# Altium PCB BME462.PcbDoc
Units mil, origin at the board's own origin, x right, y up, seen from the top; angles counter-clockwise.
Board outline 4508 x 3432 mil, 2 copper layers (Top Layer, Bottom Layer); 35 components, 35 nets, 168 pads, 0 vias.
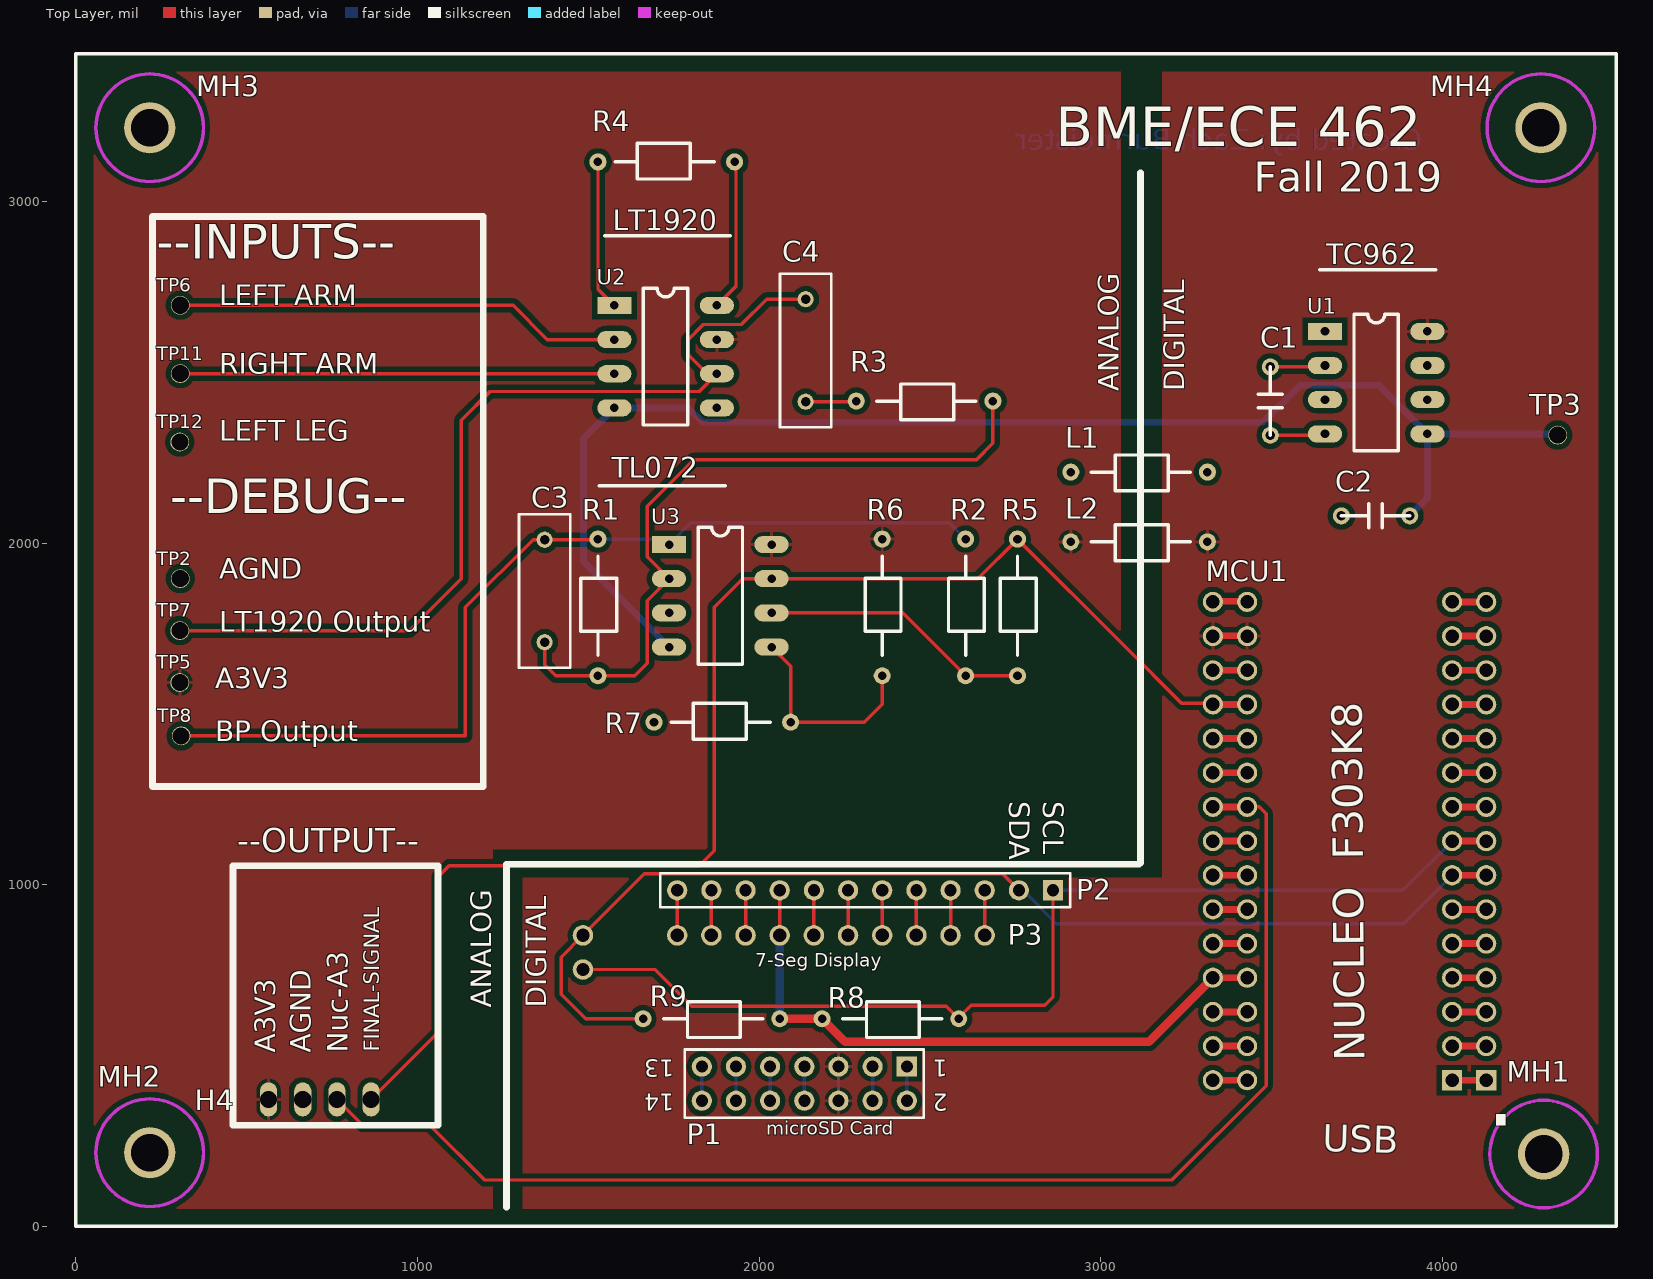
[diagram p0: Top Layer view]
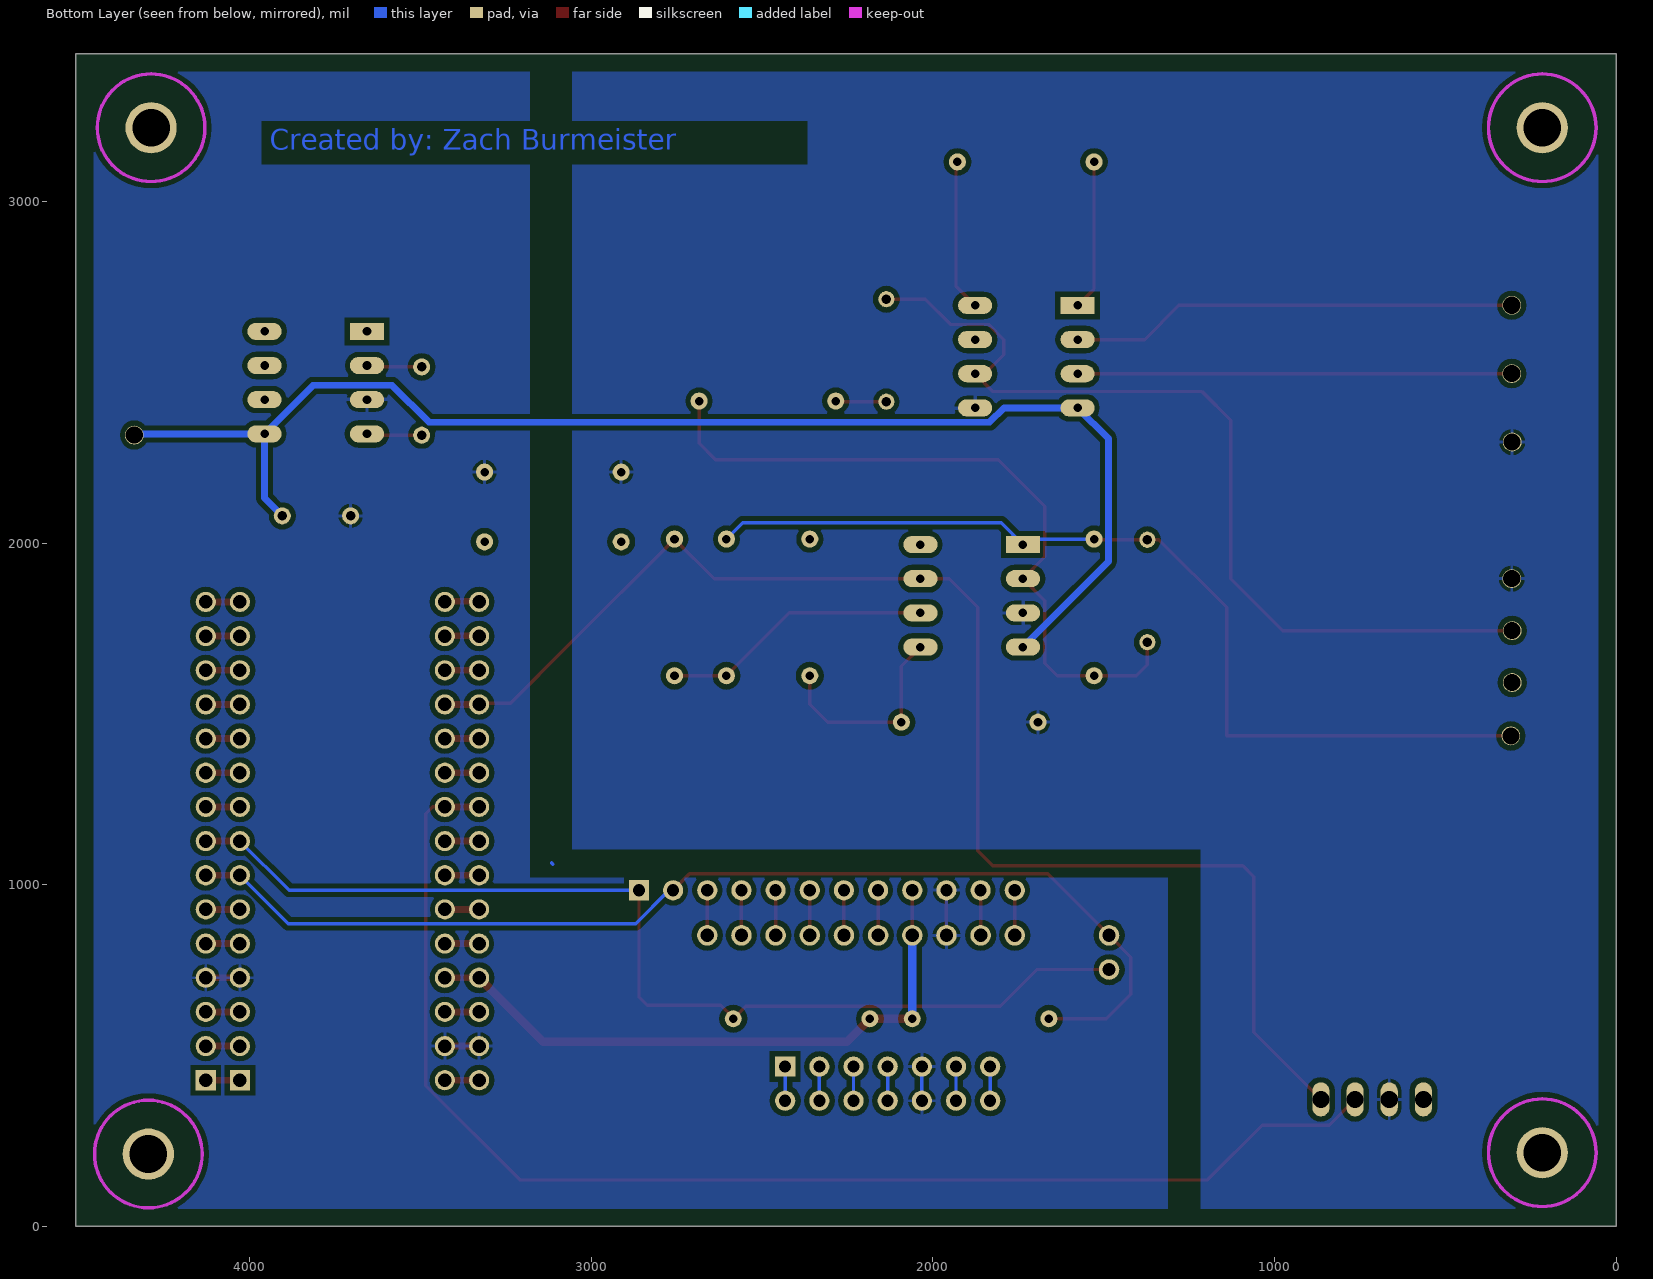
[diagram p1: Bottom Layer view, seen from below]

## Layer stack, top to bottom
Top Solder: solder mask 0.4, Solder Resist, Dk 3.5
Top Layer: signal copper 1.4
Dielectric1: dielectric 12.6, FR-4, Dk 4.8
Bottom Layer: signal copper 1.4
Bottom Solder: solder mask 0.4, Solder Resist, Dk 3.5

## Board outline
0,3432 4508,3432 4508,0 0,0

## Design rules (kind name [scope] priority, off if disabled: settings)
Clearance Polygon_Clearance [All vs InPolygon] p1: gap=15 ignorepadtopadclearanceinfootprint=FALSE except(0: Arc-Hole Track-Hole SMDPad-Hole THPad-Hole Via-Hole Fill-Hole Poly-Hole Region-Hole Text-Hole)
Clearance [All] p2: gap=7 ignorepadtopadclearanceinfootprint=FALSE except(0: Arc-Hole Track-Hole SMDPad-Hole THPad-Hole Via-Hole Fill-Hole Poly-Hole Region-Hole Text-Hole)
ComponentClearance [InComponent('U3')] p1: gap=0 collisioncheckmode=3 verticalgap=10 showdistances=FALSE
Height [All] p1: minheight=0 maxheight=866.14 prefheight=500
HoleSize [All] p1: absolutevalues=TRUE maxlimit=250 minlimit=1.18 maxpercent=80.000 minpercent=20.000
MinimumSolderMaskSliver [All] p1: minsoldermaskwidth=2
PolygonConnect [All vs IsVia] p1: connectstyle=Direct reliefconductorwidth=10 reliefentries=4 polygonreliefangle="90 Angle" airgapwidth=10
PolygonConnect PolygonConnect_1 [All] p2: connectstyle=Relief reliefconductorwidth=10 reliefentries=4 polygonreliefangle="90 Angle" airgapwidth=10
RoutingVias [All] p1: holewidth=28 width=50 viastyle="Through Hole" minholewidth=15 minwidth=25 maxholewidth=28 maxwidth=50
SilkToSolderMaskClearance [IsPad] p1: minsilkscreentomaskgap=8 clearancetoexposedcopper=TRUE
SolderMaskExpansion [All] p1: expansion=2
Width "Schematic Width Constraint" [InNet('Neg_3V3')] p1: maxlimit=20 minlimit=20 preferedwidth=20 minimp=50.000000 maximp=50.000000 favimp=50.000000
Width [All] p2: maxlimit=472.44 minlimit=3.94 preferedwidth=10 minimp=50.000000 maximp=50.000000 favimp=50.000000
25 further rules are at their usual default settings.

## Classes and differential pairs
component class "03 Peripherals": MH1 MH2 MH3 MH4 P1 P2 P3 R8 R9
component class "02 ECG Amplifier": C1 C2 C3 C4 H4 L1 L2 MCU1 R1 R2 R3 R4 R5 R6 R7 TP2 TP3 TP5 TP6 TP7 TP8 TP11 TP12 U1 U2 U3 U?

## Components (designator, comment, footprint, x,y, rotation, side; value= is the part's Value field where it differs from the comment)
C1 "Cap-10u" Capacitor 3496,2316 r90 top
C2 "Cap-10u" Capacitor 3704,2080 r0 top
C3 "Cap" RAD-0.3 1372,1860 r90 top value=100pF
C4 "Cap" RAD-0.3 2136,2564 r270 top
H4 "Header4x1" "4 pin header" 564,372 r90 top
L1 "FerriteBead" RESISTOR 2912,2208 r0 top
L2 "FerriteBead" RESISTOR 2912,2004 r0 top
MCU1 "Nucleo F303K8_FINISHED" "Nucleo F303K8" 3728,1128 r180 top
MH1 "Mounting Hole" "Mounting Hole" 4296,212 r0 top
MH2 "Mounting Hole" "Mounting Hole" 216,216 r0 top
MH3 "Mounting Hole" "Mounting Hole" 216,3216 r0 top
MH4 "Mounting Hole" "Mounting Hole" 4288,3216 r0 top
P1 "Header 7X2" HDR2X7 2432,468 r180 top
P2 "Proto Header" HDR1X12 2860,984 r180 top
P3 "7Segment" 7SegmentDisplay 1403,904 r270 top
R1 "Res-3M" RESISTOR 1528,1612 r90 top
R2 "20k" RESISTOR 2604,1612 r90 top
R3 "15k" RESISTOR 2284,2416 r0 top
R4 "Res-10k" RESISTOR 1928,3116 r180 top
R5 "Res-10k" RESISTOR 2756,1612 r90 top
R6 "20k" RESISTOR 2360,1612 r90 top
R7 "Res-10k" RESISTOR 2092,1476 r180 top
R8 "Res-2.21k" RESISTOR 2184,608 r0 top
R9 "Res-2.21k" RESISTOR 1660,608 r0 top
TP2 "TestPoint" TestPoint 304,1896 r90 top
TP3 "TestPoint" TestPoint 4336,2316 r90 top
TP5 "TestPoint" TestPoint 302.74,1591.69 r90 top
TP6 "TestPoint" TestPoint 304,2696 r90 top value="Left Arm"
TP7 "TestPoint" TestPoint 302.74,1743.69 r90 top
TP8 "TestPoint" TestPoint 306.74,1435.69 r90 top
TP11 "TestPoint" TestPoint 304,2496 r90 top value="Right Arm"
TP12 "TestPoint" TestPoint 302.74,2295.69 r90 top value="Right Leg"
U1 "TC962" DIP8 3656,2620 r0 top
U2 "LT1920" DIP8 1576,2696 r0 top
U3 "TL072" DIP8 1736,1996 r0 top

## Footprints (in the part's own frame and the unit in brackets; to place one, negate y for a bottom-side part, rotate by r counter-clockwise, add the part's x,y. Pads: shape width x height; smd on the part's side, far side on the other; paste and mask are expansions set on the pad)
"4 pin header" [mil]
  oval 100x50 hole 50: 1(0,0) 2(0,-100) 3(0,-200) 4(0,-300)
7SegmentDisplay [mil]
  round 60 hole 39: 0(52,357) 1(52,457) 2(52,557) 3(52,657) 4(52,757) 5(52,857) 6(52,957) 7(52,1057) 8(52,1157) 9(52,1257) 10(152,81) 11(52,81)
Capacitor [mil] "200 mil"
  round 50 hole 28: 1(0,0) 2(200,0)
  silkscreen extent 0,-35 200,35
DIP8 [mil]
  rect 100x50 hole 25: 1(0,0)
  oval 100x50 hole 25: 2(0,-100) 3(0,-200) 4(0,-300) 5(300,-300) 6(300,-200) 7(300,-100) 8(300,0)
  silkscreen extent 85,-350 215,50
HDR1X12 [mm] "Connector; Header; 12 Position"
  rect 1.5x1.5 hole 0.9: 1(0,0)
  round 1.5 hole 0.9: 2(2.54,0) 3(5.08,0) 4(7.62,0) 5(10.16,0) 6(12.7,0) 7(15.24,0) 8(17.78,0) 9(20.32,0) 10(22.86,0) 11(25.4,0) 12(27.94,0)
  silkscreen extent -1.27,-1.27 29.21,1.27
HDR2X7 [mm] "Connector; Header; 7x2 Position"
  rect 1.5x1.5 hole 0.9: 1(0,0)
  round 1.5 hole 0.9: 2(0,2.54) 3(2.54,0) 4(2.54,2.54) 5(5.08,0) 6(5.08,2.54) 7(7.62,0) 8(7.62,2.54) 9(10.16,0) 10(10.16,2.54) 11(12.7,0) 12(12.7,2.54) 13(15.24,0) 14(15.24,2.54)
  silkscreen extent -1.27,-1.27 16.51,3.81
"Mounting Hole" [mil]
  round 150 hole 110: 1(0,0)
  Keep-Out Layer circle w10: c0,0 r157.48
"Nucleo F303K8" [mm] "Nucleo Header"
  rect 1.5x1.5 hole 1: 1(-10.16,17.78) 1(-7.62,17.78)
  round 1.5 hole 1: 2(-10.16,15.24) 2(-7.62,15.24) 3(-10.16,12.7) 3(-7.62,12.7) 4(-10.16,10.16) 4(-7.62,10.16) 5(-10.16,7.62) 5(-7.62,7.62) 6(-10.16,5.08) 6(-7.62,5.08) 7(-10.16,2.54) 7(-7.62,2.54) 8(-10.16,0) 8(-7.62,0) 9(-10.16,-2.54) 9(-7.62,-2.54) 10(-10.16,-5.08) 10(-7.62,-5.08) 11(-10.16,-7.62) 11(-7.62,-7.62) 12(-10.16,-10.16) 12(-7.62,-10.16) 13(-10.16,-12.7) 13(-7.62,-12.7) 14(-10.16,-15.24) 14(-7.62,-15.24) 15(-10.16,-17.78) 15(-7.62,-17.78) 16(7.62,-17.78) 16(10.16,-17.78) 17(7.62,-15.24) 17(10.16,-15.24) 18(7.62,-12.7) 18(10.16,-12.7) 19(7.62,-10.16) 19(10.16,-10.16) 20(7.62,-7.62) 20(10.16,-7.62) 21(7.62,-5.08) 21(10.16,-5.08) 22(7.62,-2.54) 22(10.16,-2.54) 23(7.62,0) 23(10.16,0) 24(7.62,2.54) 24(10.16,2.54) 25(7.62,5.08) 25(10.16,5.08) 26(7.62,7.62) 26(10.16,7.62) 27(7.62,10.16) 27(10.16,10.16) 28(7.62,12.7) 28(10.16,12.7) 29(7.62,15.24) 29(10.16,15.24) 30(7.62,17.78) 30(10.16,17.78)
  Top Layer lines w0.508: 10.262,-17.831 7.722,-17.831 ; 10.16,17.78 7.62,17.78 ; 10.16,15.24 7.62,15.24 ; 10.16,12.7 7.62,12.7 ; 10.16,10.16 7.62,10.16 ; 10.16,7.62 7.62,7.62 ; 10.16,5.08 7.62,5.08 ; 10.16,2.54 7.62,2.54 ; 10.16,0 7.62,0 ; 10.16,-2.54 7.62,-2.54 ; 10.16,-5.08 7.62,-5.08 ; 10.16,-7.62 7.62,-7.62 ; 10.16,-10.16 7.62,-10.16 ; 10.16,-12.7 7.62,-12.7 ; 9.982,-15.265 7.442,-15.265 ; -7.62,17.78 -10.16,17.78 ; -7.62,15.24 -10.16,15.24 ; -7.62,12.7 -10.16,12.7 ; -7.62,10.16 -10.16,10.16 ; -7.62,7.62 -10.16,7.62 ; -7.62,5.08 -10.16,5.08 ; -7.62,2.54 -10.16,2.54 ; -7.62,0 -10.16,0 ; -7.62,-2.54 -10.16,-2.54 ; -7.62,-5.08 -10.16,-5.08 ; -7.62,-7.62 -10.16,-7.62 ; -7.62,-10.16 -10.16,-10.16 ; -7.62,-12.7 -10.16,-12.7 ; -7.62,-15.24 -10.16,-15.24 ; -7.62,-17.78 -10.16,-17.78
RAD-0.3 [mm] "Radial Cap, Thru-Hole; 2 Leads; 0.3 in Pin Spacing"
  round 1.2 hole 0.7: 1(-3.81,0) 2(3.81,0)
  silkscreen extent -5.71,-1.91 5.71,1.91
RESISTOR [mil]
  round 50 hole 25: 1(0,0) 2(400,0)
  silkscreen extent 60,-55 350,50
TestPoint [mil]
  round 55 hole 50 mask+3: 1(0.31,-1.26)

## Part data
C1 C2: Capacitance=10µF, Manufacturer="TDK Corporation", Manufacturer Part Number=FK26X7R1C106K, Operating Temperature="-55°C ~ 125°C", Package / Case=Radial, Ratings=-, Supplier Part Number 1=445-8549-ND, Temperature Coefficient=X7R, Tolerance=±10%, Voltage - Rated=16V, Applications="General Purpose", Category=Capacitors, ComponentLink1Description=https://product.tdk.com/info/en/documents/catalog/leadmlcc_conventional_fk_en.pdf, ComponentLink1URL=https://product.tdk.com/info/en/documents/catalog/leadmlcc_conventional_fk_en.pdf, Features=-, Height - Seated (Max)="0.236\" (6.00mm)", Lead Spacing="0.197\" (5.00mm)", Lead Style="Formed Leads - Kinked", Mounting Type="Through Hole", Packaging=Bulk, Pricing 1="1=0.45, 10=0.319, 100=0.2101, 250=0.17896, 500=0.1556, 1000=0.13226, 5000=0.1167, 10000=0.10892, 25000=0.10503 (USD)", RoHS="RoHS Compliant", Size / Dimension="0.217\" L x 0.138\" W (5.50mm x 3.50mm)", Stock 1=7933, Supplier 1=Digi-Key, Thickness (Max)=-
C3 C4: "Capacitor", LatestRevisionDate=17-Jul-2002, LatestRevisionNote="Re-released for DXP Platform.", PackageDescription="Radial Cap, Thru-Hole; 2 Leads; 0.3 in Pin Spacing", PackageReference=RAD-0.3, Published=8-Jun-2000, Publisher="Altium Limited"
  C4: =22µF
L1 L2: Current Rating (Max)=5A, DC Resistance (DCR) (Max)="10 mOhm", Impedance @ Frequency="75 Ohm @ 100MHz", Manufacturer="Laird-Signal Integrity Products", Manufacturer Part Number=28L0138-10R-10, Operating Temperature=-, Package / Case=Axial, Supplier Part Number 1=240-2438-1-ND, Category=Filters, ComponentLink1Description=http://media.digikey.com/pdf/Data%20Sheets/Laird%20Technologies/28L0138-10R-10_Dwg.pdf, ComponentLink1URL=http://media.digikey.com/pdf/Data%20Sheets/Laird%20Technologies/28L0138-10R-10_Dwg.pdf, Filter Type=-, Height (Max)=-, Mounting Type="Through Hole", Number of Lines=1, Packaging="Cut Tape (CT)", Part Status=Active, Pricing 1="1=0.1, 10=0.076, 25=0.0684, 50=0.05, 100=0.0433, 250=0.03416, 500=0.02884, 1000=0.02429 (USD)", Ratings=-, RoHS="RoHS Compliant", Size / Dimension="0.138\" Dia x 0.175\" L (3.51mm x 4.45mm)", Stock 1=25546, Supplier 1=Digi-Key
MCU1: "Nucleo F303K8", Current Rating=3A, Insulation Color=Black, Manufacturer="Sullins Connector Solutions", Manufacturer Part Number=PPTC151LFBN-RC, Material Flammability Rating="UL94 V-0", Operating Temperature="-40°C ~ 105°C", Supplier Part Number 1=S7013-ND, Voltage Rating=250V, Applications=-, Category="Connectors, Interconnects", ComponentLink1Description=http://www.sullinscorp.com/drawings/78_P(N)PxCxxxLFBN-RC,_10492-H.pdf, ComponentLink1URL=http://www.sullinscorp.com/drawings/78_P(N)PxCxxxLFBN-RC,_10492-H.pdf, Connector Type=Header, Contact Finish - Mating=Tin, Contact Finish - Post=Tin, Contact Finish Thickness - Mating=-, Contact Finish Thickness - Post=-, Contact Length - Post="0.126\" (3.20mm)", Contact Material="Phosphor Bronze", Contact Shape=Square, Contact Type="Female Socket", Fastening Type=Push-Pull, Features=-, Ingress Protection=-, Insulation Height="0.335\" (8.51mm)", Insulation Material=Polyester, Mated Stacking Heights=-, Mounting Type="Through Hole", Number of Positions=15, Number of Positions Loaded=All, Number of Rows=1, Packaging=Bulk, Part Status=Active, Pitch - Mating="0.100\" (2.54mm)", Pricing 1="1=1.22, 10=1.013, 25=0.9376, 50=0.8438, 100=0.75, 250=0.65624, 500=0.6, 1000=0.54375, 2500=0.4875 (USD)", RoHS="RoHS Compliant", Row Spacing - Mating=-, Stock 1=2938, Style="Board to Board", Supplier 1=Digi-Key, Termination=Solder
P1: "Header, 7-Pin, Dual row", LatestRevisionDate=17-Jul-2002, LatestRevisionNote="Re-released for DXP Platform.", Publisher="Altium Limited"
P2: library part "Header 12", "Header, 12-Pin", LatestRevisionDate=17-Jul-2002, LatestRevisionNote="Re-released for DXP Platform.", Publisher="Altium Limited"
R1: Manufacturer="Stackpole Electronics Inc.", Manufacturer Part Number=CF14JT30K0, Operating Temperature="-55°C ~ 155°C", Package / Case=Axial, Power (Watts)="0.25W, 1/4W", Resistance (Ohms)=3Meg, Temperature Coefficient="0/ -500ppm/°C", Tolerance=±5%, Category=Resistors, ComponentLink1Description=https://www.seielect.com/Catalog/SEI-CF_CFM.pdf, ComponentLink1URL=https://www.seielect.com/Catalog/SEI-CF_CFM.pdf, Composition="Carbon Film", Failure Rate=-, Features="Flame Retardant Coating, Safety", Height - Seated (Max)=-, Packaging="Cut Tape (CT)", Part Status=Active, RoHS="RoHS Compliant", Size / Dimension="0.091\" Dia x 0.236\" L (2.30mm x 6.00mm)", Supplier 1=Arrow, Supplier Device Package=Axial
R2 R6: library part Res-20k, Supplier 1=Arrow
R3: library part Res-15k, Supplier 1=Arrow
R4 R5 R7: Manufacturer="Stackpole Electronics Inc.", Manufacturer Part Number=CF14JT10K0, Operating Temperature="-55°C ~ 155°C", Package / Case=Axial, Power (Watts)="0.25W, 1/4W", Resistance (Ohms)=10k, Supplier Part Number 1=CF14JT10K0CT-ND, Temperature Coefficient="0/ -500ppm/°C", Tolerance=±5%, Category=Resistors, ComponentLink1Description=http://www.seielect.com/catalog/SEI-CF_CFM.pdf, ComponentLink1URL=http://www.seielect.com/catalog/SEI-CF_CFM.pdf, Composition="Carbon Film", Features="Flame Retardant Coating, Safety", Height=-, Number of Terminations=2, Packaging="Cut Tape (CT)", Pricing 1="1=0.1, 10=0.04, 50=0.022, 100=0.0162, 250=0.01236, 500=0.0099, 1000=0.00729, 2500=0.00632 (USD)", RoHS="RoHS Compliant", Size / Dimension="0.091\" Dia x 0.256\" L (2.30mm x 6.50mm)", Stock 1=1509635, Supplier 1=Digi-Key, Supplier Device Package=Axial
R8 R9: Manufacturer="Stackpole Electronics Inc.", Manufacturer Part Number=RNF14FTD2K21, Operating Temperature="-55°C ~ 155°C", Package / Case=Axial, Power (Watts)="0.25W, 1/4W", Resistance (Ohms)=2.21k, Supplier Part Number 1=RNF14FTD2K21CT-ND, Temperature Coefficient=±100ppm/°C, Tolerance=±1%, Category=Resistors, ComponentLink1Description=http://www.seielect.com/Catalog/SEI-RNF_RNMF.pdf, ComponentLink1URL=http://www.seielect.com/Catalog/SEI-RNF_RNMF.pdf, Composition="Metal Film", Failure Rate=-, Features="Flame Retardant Coating, Safety", Height - Seated (Max)=-, Packaging="Cut Tape (CT)", Part Status=Active, Pricing 1="1=0.1, 10=0.072, 25=0.0496, 50=0.0386, 100=0.0275, 250=0.02144, 500=0.01706, 1000=0.0121 (USD)", RoHS="RoHS Compliant", Size / Dimension="0.093\" Dia x 0.250\" L (2.35mm x 6.35mm)", Stock 1=19505, Supplier 1=Digi-Key, Supplier Device Package=Axial
U1: Supplier Part Number 1=TC962CPA-ND, Supplier 1=Digi-Key
U2: Supplier Part Number 1=LT1920CN8#PBF-ND, Supplier 1=Digi-Key
U3: Current - Output / Channel=-, Current - Supply=1.4mA, Manufacturer="Texas Instruments", Manufacturer Part Number=TL072IP, Operating Temperature="-40°C ~ 85°C", Package / Case="8-DIP (0.300\", 7.62mm)", Supplier Device Package=8-PDIP, Supplier Part Number 1=296-14997-5-ND, Voltage - Supply, Single/Dual (±)="7 V ~ 36 V, ±3.5 V ~ 18 V", -3db Bandwidth=-, Amplifier Type=J-FET, Category="Integrated Circuits (ICs)", ComponentLink1Description=http://www.ti.com/lit/ds/symlink/tl071a.pdf, ComponentLink1URL=http://www.ti.com/lit/ds/symlink/tl071a.pdf, Mounting Type="Through Hole", Number of Circuits=2, Output Type=-, Packaging=Tube, Part Status=Active, Pricing 1="1=0.69, 10=0.607, 100=0.4655, 500=0.368, 1000=0.2944 (USD)", RoHS="RoHS Compliant", Slew Rate="13 V/µs", Stock 1=2537, Supplier 1=Digi-Key
TP2 TP3 TP5 TP6 TP7 TP8 TP11 TP12: Usage=DNP

## Nets (pads, with @x,y where several pads share a name; then routed paths per layer and width w, separated by ;. In a path a pad name is that pad's centre, name@x,y a point inside that pad or via, vN(x,y) a via of type N, cw(c..) or ccw(c..) an arc to the next point about the centre after c; other vN are vias at no path point)
3V3: L2.2 MCU1.17 P1.5 P1.6 U1.8 | length 100
  Bottom Layer w10: P1.6 P1.5
5V: MCU1.27 P2.9 P3.3 R8.1 R9.2 | length 1750
  Top Layer w10: P3.3 P2.9
  Top Layer w25: R9.2 R8.1 2252,540 3140,540 MCU1.27@3328,728
  Bottom Layer w25: R9.2 P3.3
A3V3: H4.1 L2.1 R6.2 TP5.1 U2.7 U3.8 | length 5.7
  Top Layer w10: U3.8@2032,2000 U3.8
AGND: H4.2 L1.1 R7.2 TP2.1 TP12.1 U2.5 U3.3
Aout: H4.3 MCU1.22 | length 3808.4
  Top Layer w10: H4.3@780,372 H4.3 840,296 1036,296 1196,136 3208,136 3484,412 3484,1208 3464,1228 MCU1.22@3428,1228
DisplaySCL: MCU1.8 P2.1 P3.10 R8.2 | length 3004.1
  Top Layer w10: P3.10 1696,752 1803,645 2547,645 R8.2 2584,612 2620,648 2836,648 2860,672 P2.1
  Bottom Layer w10: P2.1 3884,984 MCU1.8@4028,1128
DisplaySDA: MCU1.7 P2.2 P3.11 R9.1 | length 3225.8
  Top Layer w10: R9.1 1492,608 1420,680 1420,788 P3.11 1664,1032 2712,1032 P2.2 P2.2@2780,984
  Bottom Layer w10: P2.2 2772,984 2869.53,886.47 3886.47,886.47 MCU1.7@4028,1028
Final_Signal: H4.4 MCU1.19 R5.2 U3.7 | length 4028
  Top Layer w10: H4.4 1060,568 1060,1024 1092,1056 1824,1056 1868,1100 1868,1812 1952,1896 U3.7 2640,1896 R5.2 3068,1700 3236,1532 3324,1532 MCU1.19@3328,1528
GND: C2.1 L1.2 MCU1.4 MCU1.29 P1.9 P1.10 P2.10 P3.2 U1.3 | length 232
  Top Layer w10: P3.2 P2.10
  Bottom Layer w10: P1.10 P1.9
Neg_3V3: C2.2 TP3.1 U1.5 U2.4 U3.4 | length 3986.1
  Bottom Layer w20: U3.4 1486,1946 1486,2306 U2.4 1791.6,2396 1833.6,2354 3474.6,2354 3582.6,2462 3814,2462 U1.5 ; C2.2 3956,2132 U1.5 ; TP3.1 4333.57,2320 U1.5
NetC1_1: C1.1 U1.4 | length 161.7
  Top Layer w10: C1.1 3652,2316 U1.4
NetC1_2: C1.2 U1.2 | length 161.7
  Top Layer w10: C1.2 3652,2516 U1.2
NetC3_1: C3.1 R1.1 R3.2 U3.2 | length 2119.4
  Top Layer w10: C3.1 1372,1644 1404,1612 R1.1 1636,1612 1672,1648 1672,1832 U3.2 1672,1960 1672,2108 1808,2244 2636,2244 2684,2292 R3.2
NetC4_1: C4.1 TP7.1 U2.6 | length 2699.4
  Top Layer w10: TP7.1 976,1744 1128,1896 1128,2360 1212,2444 1824,2444 U2.6 1848,2496 1792,2552 1792,2596 1836,2640 1948,2640 2022,2714 C4.1
NetC4_2: C4.2 R3.1 | length 148.8
  Top Layer w10: C4.2 2282,2414 R3.1
NetP1_1: P1.1 P1.2 | length 100
  Bottom Layer w10: P1.2 P1.1
NetP1_3: P1.3 P1.4 | length 100
  Bottom Layer w10: P1.4 P1.3
NetP1_7: P1.7 P1.8 | length 100
  Bottom Layer w10: P1.8 P1.7
NetP1_11: P1.11 P1.12 | length 100
  Bottom Layer w10: P1.12 P1.11
NetP1_13: P1.13 P1.14 | length 100
  Bottom Layer w10: P1.14 P1.13
NetP2_3: P2.3 P3.9 | length 132
  Top Layer w10: P3.9 P2.3
NetP2_4: P2.4 P3.8 | length 132
  Top Layer w10: P3.8 P2.4
NetP2_5: P2.5 P3.7 | length 132
  Top Layer w10: P3.7 P2.5
NetP2_6: P2.6 P3.6 | length 132
  Top Layer w10: P3.6 P2.6
NetP2_7: P2.7 P3.5 | length 132
  Top Layer w10: P3.5 P2.7
NetP2_8: P2.8 P3.4 | length 132
  Top Layer w10: P3.4 P2.8
NetP2_11: P2.11 P3.1 | length 132
  Top Layer w10: P3.1 P2.11
NetP2_12: P2.12 P3.0 | length 132
  Top Layer w10: P3.0 P2.12
NetR2_1: R2.1 R5.1 U3.6 | length 796.2
  Top Layer w10: U3.6 2420,1796 R2.1 R5.1
NetR4_1: R4.1 U2.8 | length 444.9
  Top Layer w10: U2.8 1932,2752 1932,3112 R4.1
NetR4_2: R4.2 U2.1 | length 447.9
  Top Layer w10: R4.2@1528,3124 R4.2 1528,2744 U2.1
NetR6_1: R6.1 R7.1 U3.5 | length 600.7
  Top Layer w10: U3.5 2092,1640 R7.1 ; R7.1@2104,1476 2308,1476 2360,1528 R6.1@2360,1608
NetTP6_1: TP6.1 U2.2 | length 1315.8
  Top Layer w10: TP6.1 1187.68,2696.31 ; 1184,2696 1280,2696 1380,2596 U2.2
NetTP11_1: TP11.1 U2.3 | length 1282.4
  Top Layer w10: TP11.1 1127.68,2496.31 ; 1112,2496 U2.3@1572,2496
Signal_Amplified: C3.2 R1.2 R2.2 TP8.1 U3.1 | length 2807.9
  Top Layer w10: TP8.1 1140,1436 1140,1812 1338,2010 C3.2 1526,2010 R1.2
  Bottom Layer w10: R1.2 1720,2012 U3.1 1800,2060 2556,2060 R2.2
pads on no net: MCU1.1 MCU1.2 MCU1.3 MCU1.5 MCU1.6 MCU1.9 MCU1.10 MCU1.11 MCU1.12 MCU1.13 MCU1.14 MCU1.15 MCU1.16 MCU1.18 MCU1.20 MCU1.21 MCU1.23 MCU1.24 MCU1.25 MCU1.26 MCU1.28 MCU1.30 MH1.1 MH2.1 MH3.1 MH4.1 U1.1 U1.6 U1.7
copper on no net: | length 5.7
  Bottom Layer w10: 3112,1060 3116,1064

## Polygon pours and split planes (outlines as drawn)
GND on Bottom Layer "Bottom Layer-GND" (solid, remove dead copper, pour order 10): 3180,3380 4456,3380 4456,52 1312,52 1312,104 1312,1020 3180,1020
AGND on Bottom Layer "Bottom Layer-AGND" (solid, remove dead copper, pour order 16): 1216,52 1216,1104 3056,1104 3056,3380 52,3380 52,52
A3V3 on Top Layer "Top Layer-A3V3" (solid, remove dead copper, pour order 14): 1220,52 1220,1104 3057.58,1104 3057.58,3380 52,3380 52,52
3V3 on Top Layer "Top Layer-3V3" (solid, remove dead copper, pour order 12): 3180,3380 4456,3380 4456,52 1308,52 1308,1020 3180,1020

## Other copper
Top Layer:
  region: 764,372
Bottom Layer:
  text "Created by: Zach Burmeister" at 3940,3152 h60

## Silkscreen, mask and mechanical layers (free items; w line width, h text height)
Top Overlay:
  lines w10: 1532,2168 1900,2168 ; 1548,2900 1916,2900 ; 3640,2800 3980,2800 ; 0,0 4508,0 4508,3432 0,3432 0,0
  lines w20: 460,296 1060,296 1060,1056 460,1056 460,300 ; 1260,56 1260,1060 3112,1060 ; 3116,1064 3116,3084 ; 224,1288 1192,1288 1192,2956 224,2956 224,1288
  text "BME/ECE 462" at 2868,3124 h200
  text "Fall 2019" at 3448,3000 h150
  text "LT1920" at 1572,2916 h60
  text "--INPUTS--" at 236,2832 h100
  text "TC962" at 3660,2816 h60
  text "LEFT ARM" at 420,2696 h60
  text "RIGHT ARM" at 420,2496 h60
  text "ANALOG" at 3052,2444 h60 r90
  text "DIGITAL" at 3244,2444 h60 r90
  text "LEFT LEG" at 420,2300 h60
  text "TL072" at 1568,2192 h60
  text "--DEBUG--" at 276,2088 h100
  text "AGND" at 420,1896 h60
  text "LT1920 Output" at 420,1740 h60
  text "A3V3" at 408,1576 h60
  text "BP Output" at 408,1420 h60
  text "SDA" at 2732,1244 h60 r270
  text "SCL" at 2832,1244 h60 r270
  text "--OUTPUT--" at 472,1072 h120
  text "7-Seg Display" at 1988,760 h40
  text "ANALOG" at 1216,640 h60 r90
  text "DIGITAL" at 1376,640 h60 r90
  text "FINAL-SIGNAL" at 888,512 h45 r90
  text "A3V3" at 584,508 h60 r90
  text "AGND" at 688,508 h60 r90
  text "Nuc-A3" at 796,508 h60 r90
  text "NUCLEO  F303K8" at 3772,484 h90 r90.44
  text "microSD Card" at 2020,268 h40
Mechanical 6:
  lines w10: 0,0 0,3432 4508,3432
Mechanical 9:
  lines w10: 4508,0 4508,3432 ; 4508,0 0,0 0,3432 4508,3432 ; 4508,0 4508,3432
Drill Drawing:

## Text inside footprints (layer, text, board x,y; h text height)
MCU1: Top Overlay "USB" at 3648,220 h78.74 r358.45
P1: Top Overlay "13" at 1752,488 h50 r180; Top Overlay "14" at 1752,388 h50 r180; Top Overlay "1" at 2552,488 h50 r180; Top Overlay "2" at 2552,388 h50 r180